# Altium PCB ring_v3.PcbDoc
Units mil, origin at the board's own origin, x right, y up, seen from the top; angles counter-clockwise.
Board outline 449 x 250 mil, 2 copper layers (Top Layer, Bottom Layer); 9 components, 6 nets, 21 pads, 3 vias.
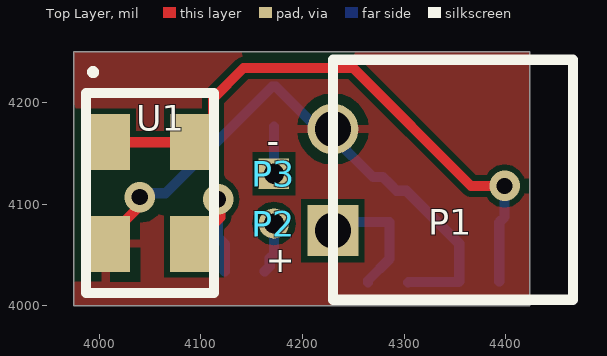
[diagram p0: Top Layer view]
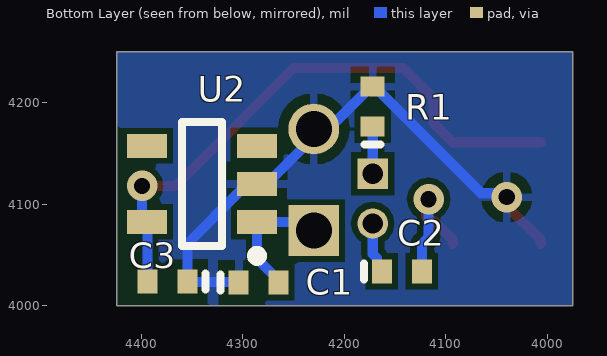
[diagram p1: Bottom Layer view, seen from below]

## Layer stack, top to bottom
Top Solder: solder mask 0.4, Solder Resist, Dk 3.5
Top Layer: signal copper 1.4
Dielectric 1: dielectric 12.6, FR-4, Dk 4.8
Bottom Layer: signal copper 1.4
Bottom Solder: solder mask 0.4, Solder Resist, Dk 3.5

## Board outline
3975,4000 4424,4000 4424,4250 3975,4250

## Design rules (kind name [scope] priority, off if disabled: settings)
Clearance "Clearance~Sunstone Circuits" [All] p1: gap=6 ignorepadtopadclearanceinfootprint=FALSE except(0: Arc-Hole Track-Hole SMDPad-Hole THPad-Hole Via-Hole Fill-Hole Poly-Hole Region-Hole Text-Hole; 5.5: SMDPad-SMDPad) // Sunstone Circuits Minimum Clearance Rule (Double Sided)
HoleSize "HoleSize~Sunstone Circuits" [All] p1: absolutevalues=TRUE maxlimit=251 minlimit=16 maxpercent=80.000 minpercent=20.000 // SSC Hole Size Rule For Single Sided & Double Sided Designs.
HoleSize Testpoint [All] p2: absolutevalues=TRUE maxlimit=100 minlimit=1 maxpercent=80.000 minpercent=20.000
HoleSize TestPointUsage [All] p3: absolutevalues=TRUE maxlimit=100 minlimit=1 maxpercent=80.000 minpercent=20.000
MinimumAnnularRing "MinimumAnnularRing~Sunstone Circuits" [All] p1: minimumring=7 // Sunstone Circuits Minimum Annular Ring (Double Sided)
PlaneClearance "PlaneClearance~Sunstone Circuits" [All] p1: clearance=12 // Sunstone Circuits Power Plane Clearance Rule (Double Sided)
PlaneConnect "PlaneConnect~Sunstone Circuits" [All] p1: planeconnectstyle=Relief reliefexpansion=10 reliefentries=4 reliefconductorwidth=8 reliefairgap=10 // Sunstone Circuits Power Plane Connect Rule (Double Sided)
PolygonConnect "PolygonConnect~Sunstone Circuits" [All] p1: connectstyle=Relief reliefconductorwidth=8 reliefentries=4 polygonreliefangle="90 Angle" airgapwidth=10 // Sunstone Circuits Polygon Connect Style (Double Sided)
RoutingVias "RoutingVias~Sunstone Circuits" [All] p1: holewidth=16 width=30 viastyle="Through Hole" minholewidth=16 minwidth=30 maxholewidth=20 maxwidth=40 // Sunstone Circuits Routing Vias Rule (Double Sided)
ShortCircuit "ShortCircuit~Sunstone Circuits" [All] p1: allowed=FALSE // Sunstone Circuits Short Circuit Rule~Do Not Allow (Double Sided)
SolderMaskExpansion "SolderMaskExpansion~Sunstone Circuits" [All] p1: expansion=3 // Sunstone Circuits Solder Mask Expansion Rule (Double Sided)
ViasUnderSMD "ViasUnderSMD~Sunstone Circuits" [All] p1: allowed=FALSE // Sunstone Circuits Vias Under SMD~Do Not Allow (Double Sided)
Width "Width~Sunstone Circuits" [All] p1: maxlimit=100 minlimit=6 preferedwidth=10 // Sunstone Circuits Minimum Width Rule (Double Sided)
26 further rules are at their usual default settings.

## Classes and differential pairs
component class ring_v3: C1 C2 C3 P1 R1 U1 U2

## Components (designator, comment, footprint, x,y, rotation, side; value= is the part's Value field where it differs from the comment)
C1 "Cap" 0402 4284.31,4023 r180 bottom value=1uF
C2 "Cap" 0402 4143.31,4034 r180 bottom value=100pF
C3 "Cap" 0402 4374,4024 r0 bottom value=2.2uF
P1 "JST-PH-small" JST-PH-small 4230,4124 r0 top
P2 "Socket" socket#1 4172,4081 r180 top
P3 "Socket" socket#2 4172,4130 r0 top
R1 "Res" 0402 4172,4196 r90 bottom value=100
U1 "ACZ-32.768KBE-T" ACZ-32.768KBE-T 4050,4111 r270 top
U2 "TPS709" SOT95P280X145-5N 4340,4120 r0 bottom

## Footprints (in the part's own frame and the unit in brackets; to place one, negate y for a bottom-side part, rotate by r counter-clockwise, add the part's x,y. Pads: shape width x height; smd on the part's side, far side on the other; paste and mask are expansions set on the pad)
0402 [mm] "Surface Mount; Body 1 x 0.5 mm (LxW typ)"
  rect 0.5x0.6 smd: 1(-0.5,0) 2(0.5,0)
  silkscreen extent -0.95,-0.2 -0.95,0.2, body extent -0.5,-0.25 0.5,0.25, height 0.5
ACZ-32.768KBE-T [mm]
  rect 1.4x1.2 smd: 1(-1.27,-1.1) 2(1.27,-1.1) 3(1.27,1.1) 4(-1.27,1.1)
  silkscreen extent -3.05,-1.6 2.5,1.6
JST-PH-small [mm]
  rect 1.271x1.271 hole 0.9: 1(0,-1.27)
  oval 1.271x1.271 hole 0.9: 2(0,1.27)
  silkscreen extent 0,-3 6,3
socket#1 [mil]
  round 30 hole 20: 0(0,0)
socket#2 [mil]
  rect 30x30 hole 20: 0(0,0)
SOT95P280X145-5N [mm] "SOT23, 5-Leads, Body 2.90x2.80mm, Pitch 0.95mm, IPC Medium Density"
  rect 1x0.6 smd: 1(-1.375,0.95) 2(-1.375,0) 3(-1.375,-0.95) 4(1.375,-0.95) 5(1.375,0.95)
  silkscreen extent -1.5,-1.55 0.5,1.92, body extent -1.5,-1.52 1.5,1.52, height 1.45

## Part data
C1 C2 C3: "Ceramic Capacitor (Surface Mount)", Manufacturer="Generic Ceramic Chip Cap (TBD)"
R1: "Chip Resistor (Surface Mount)", Manufacturer="Generic Chip Res (TBD)"
U1: "32.768kHz XO (Standard) CMOS Oscillator 3.3V Enable/Disable 4-SMD, No Lead", ComponentLink1Description=Digi-Key, ComponentLink1URL=https://www.digikey.com/product-detail/en/ACZ-32.768KBE-T/887-1670-2-ND/3454688?utm_campaign=buynow&WT.z_cid=ref_octopart_dkc_buynow&utm_medium=aggregator&curr=usd&site=us&utm_source=octopart, ComponentLink2Description=Datasheet, ComponentLink2URL=http://www.txccrystal.com/images/pdf/acz.pdf, Supplier 1=Arrow, Supplier Part Number 1=ACZ-32.768KBE-T
U2: library part TPS70933, "3.3V Ultra low power Voltage Regulator", Supplier Part Number 1=296-39474-1-ND, Supplier 1=Digi-Key

## Via types
v1: diameter 30, hole 16, Top Layer to Bottom Layer, 3 vias

## Nets (pads, with @x,y where several pads share a name; then routed paths per layer and width w, separated by ;. In a path a pad name is that pad's centre, name@x,y a point inside that pad or via, vN(x,y) a via of type N, cw(c..) or ccw(c..) an arc to the next point about the centre after c; other vN are vias at no path point)
GND: C1.1 C3.1 P1.2 R1.2 U1.2 U2.2 | length 575.6
  Top Layer w10: U1.2 4006.69,4064.94 4040,4098.24 v1(4040,4107)
  Bottom Layer w10: v1(4040,4107) 4043.83,4110.83 4065.17,4110.83 4170.03,4215.69 R1.2 4173.97,4215.69 4207.99,4181.66 4222.34,4181.66 P1.2 4230,4166.22 4269.4,4126.81 4279.06,4126.81 U2.2 4292.68,4113.19 4302.33,4113.19 4354.31,4061.2 C3.1 4353.81,4023.5 4304.5,4023.5 C1.1
NetC2_1: C2.1 P2.0 | length 50.7
  Bottom Layer w10: C2.1 4167.84,4038.84 4167.84,4046.84 4172,4051 P2.0
NetC2_2: C2.2 U1.3 | length 131.8
  Top Layer w10: U1.3 4093.31,4064.94 4111.93,4083.56 4115.87,4083.56 4119.31,4087 4119.31,4102.69 v1(4117,4105)
  Bottom Layer w10: v1(4117,4105) 4117,4067.44 4123.63,4060.81 C2.2
NetP3_0: P3.0 R1.1 | length 46.3
  Bottom Layer w10: P3.0 R1.1
VBATT: C1.2 P1.1 U2.1 | length 127.8
  Bottom Layer w10: P1.1 4238.6,4082.6 U2.1 4285.87,4046.2 4264.63,4024.97 C1.2
VCC: C3.2 U1.1 U1.4 U2.5 | length 581
  Top Layer w10: U1.1 U1.4 4111.93,4179.62 4111.93,4203.93 4142,4234 4250,4234 4366,4118 v1(4399,4118)
  Bottom Layer w10: C3.2 4393.69,4082.15 U2.5 4399,4087.46 v1(4399,4118)
pads on no net: U2.3 U2.4

## Polygon pours and split planes (outlines as drawn)
GND on Top Layer "Bottom Layer-GND" (solid, pour order 0): 3975,4250 3975,4000 4424,4000 4424,4250
GND on Bottom Layer "Bottom Layer-No Net" (solid, pour order 2): 3975,4250 3975,4000 4424,4000 4424,4250

## Silkscreen, mask and mechanical layers (free items; w line width, h text height)
Top Overlay:
  text "-" at 4165,4150 h25
  text "+" at 4164,4033 h25
Mechanical 1:
  the board outline again, w10